# EAGLE board SCFschem (EAGLE 8.3.1)
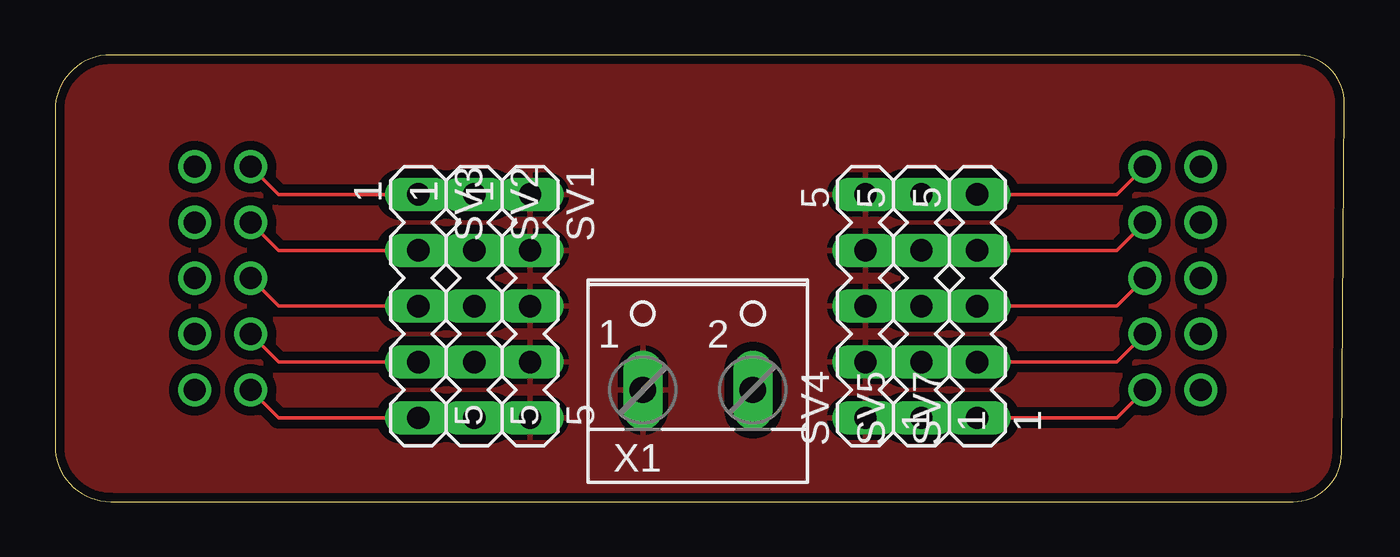
[diagram p0: board, top side]
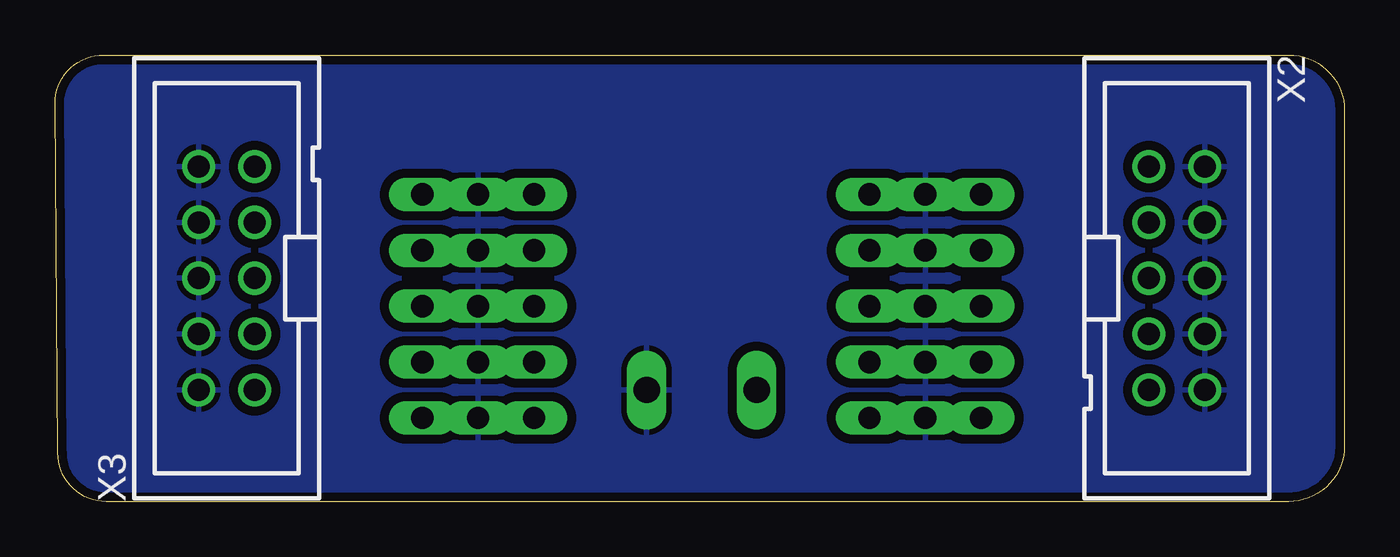
[diagram p1: board, bottom side, seen from below]

Size 58.6 x 20.31 mm. Coordinates in mm from the lower left corner, seen from the top.
Outline: 2.54,0 56.26,0 arc90 58.47,2.21 58.6,18.1 arc90 56.39,20.31 2.53,20.31 arc90 0,17.78 0,2.54 arc90 2.54,0
Copper layers (1*16): Top 0.035mm / dielectric 1.5mm / Bottom 0.035mm
Design rules "Dirty8TS *": minimum track width 8mil, minimum drill 15mil, track to track 8mil, track to pad 8mil, pad to pad 8mil, via to via 8mil, smd to smd 0mil, copper to edge 10mil, drill to drill 10mil, minimum pad ring 10mil, minimum via ring 6mil, stop-mask expansion 2mil, vias tented up to drill 25mil, thermal gap 10mil

## Footprints (pad centres in the part's own frame; a part is rotated, then mirrored left to right if it is on the bottom)
MA05-1 = drill 1.016 long: 1 -5.08,0; 2 -2.54,0; 3 0,0; 4 2.54,0; 5 5.08,0
W237-102 = drill 1.194 long: 1 -2.5,-1.27; 2 2.5,-1.27
PAK100/2500-10 = drill 1 pad 1.422: 1 -5.08,-1.27; 2 -5.08,1.27; 3 -2.54,-1.27; 4 -2.54,1.27; 5 0,-1.27; 6 0,1.27; 7 2.54,-1.27; 8 2.54,1.27; 9 5.08,-1.27; 10 5.08,1.27

## Placement (x,y rotation side)
SV1  [MA05-1]  21.59,8.89 270 top
SV2  [MA05-1]  19.05,8.89 270 top
SV3  [MA05-1]  16.51,8.89 270 top
SV4  [MA05-1]  36.83,8.89 90 top
SV5  [MA05-1]  39.37,8.89 90 top
SV7  [MA05-1]  41.91,8.89 90 top
X1  [W237-102]  29.21,6.35 0 top
X2  2510-  [PAK100/2500-10]  7.62,10.16 270 bottom
X3  2510-  [PAK100/2500-10]  50.8,10.16 90 bottom

## Library data of the parts
SV1-SV5 SV7 = con-lstb; OC_FARNELL: unknown; OC_NEWARK: unknown
X1 = ECE388; MPN: 237-102; OC_FARNELL: unknown; OC_NEWARK: 70K9898
X2 X3 = con-3m; MF: 3M; MPN: 2510-6002UB; OC_FARNELL: 9838244; OC_NEWARK: 46F4725

## Nets
GND: SV2.1 SV2.2 SV2.3 SV2.4 SV2.5 SV5.1 SV5.2 SV5.3 SV5.4 SV5.5 X1.2 X2.2 X2.4 X2.6 X2.8 X2.10 X3.2 X3.4 X3.6 X3.8 X3.10
S1: SV3.1 X2.1
S2: SV3.2 X2.3
S3: SV3.3 X2.5
S4: SV3.4 X2.7
S5: SV3.5 X2.9
S6: SV7.1 X3.1
S7: SV7.2 X3.3
S8: SV7.3 X3.5
S9: SV7.4 X3.7
S10: SV7.5 X3.9
VCC: SV1.1 SV1.2 SV1.3 SV1.4 SV1.5 SV4.1 SV4.2 SV4.3 SV4.4 SV4.5 X1.1

## Tracks (layer width: path | path; a pad name or v marks a point on that pad's centre or on a via)
GND
  pour Bottom (isolate 0.406): 2.54,20.32 57.15,20.32 58.42,19.05 58.42,1.27 57.15,0 1.27,0 0,1.27 0,19.05 1.27,20.32
S1
  Top 0.152: X2.1 10.16,13.97 SV3.1
S2
  Top 0.152: X2.3 10.16,11.43 SV3.2
S3
  Top 0.152: X2.5 10.16,8.89 SV3.3
S4
  Top 0.152: X2.7 10.16,6.35 SV3.4
S5
  Top 0.152: X2.9 10.16,3.81 SV3.5
S6
  Top 0.152: X3.1 48.26,3.81 SV7.1
S7
  Top 0.152: X3.3 48.26,6.35 SV7.2
S8
  Top 0.152: X3.5 48.26,8.89 SV7.3
S9
  Top 0.152: X3.7 48.26,11.43 SV7.4
S10
  Top 0.152: X3.9 48.26,13.97 SV7.5
VCC
  pour Top (isolate 0.406): 2.54,20.32 57.15,20.32 58.42,19.05 58.42,1.27 57.15,0 1.27,0 0,1.27 0,19.05 1.27,20.32